# Altium PCB KUOZHAN.PCBDOC (part 13 of 21)
Units mm, origin at the board's own origin, x right, y up, seen from the top; angles counter-clockwise.
Board outline 165.51 x 116.38 mm, 2 copper layers (Top Layer, Bottom Layer); 171 components, 245 nets, 894 pads, 298 vias.
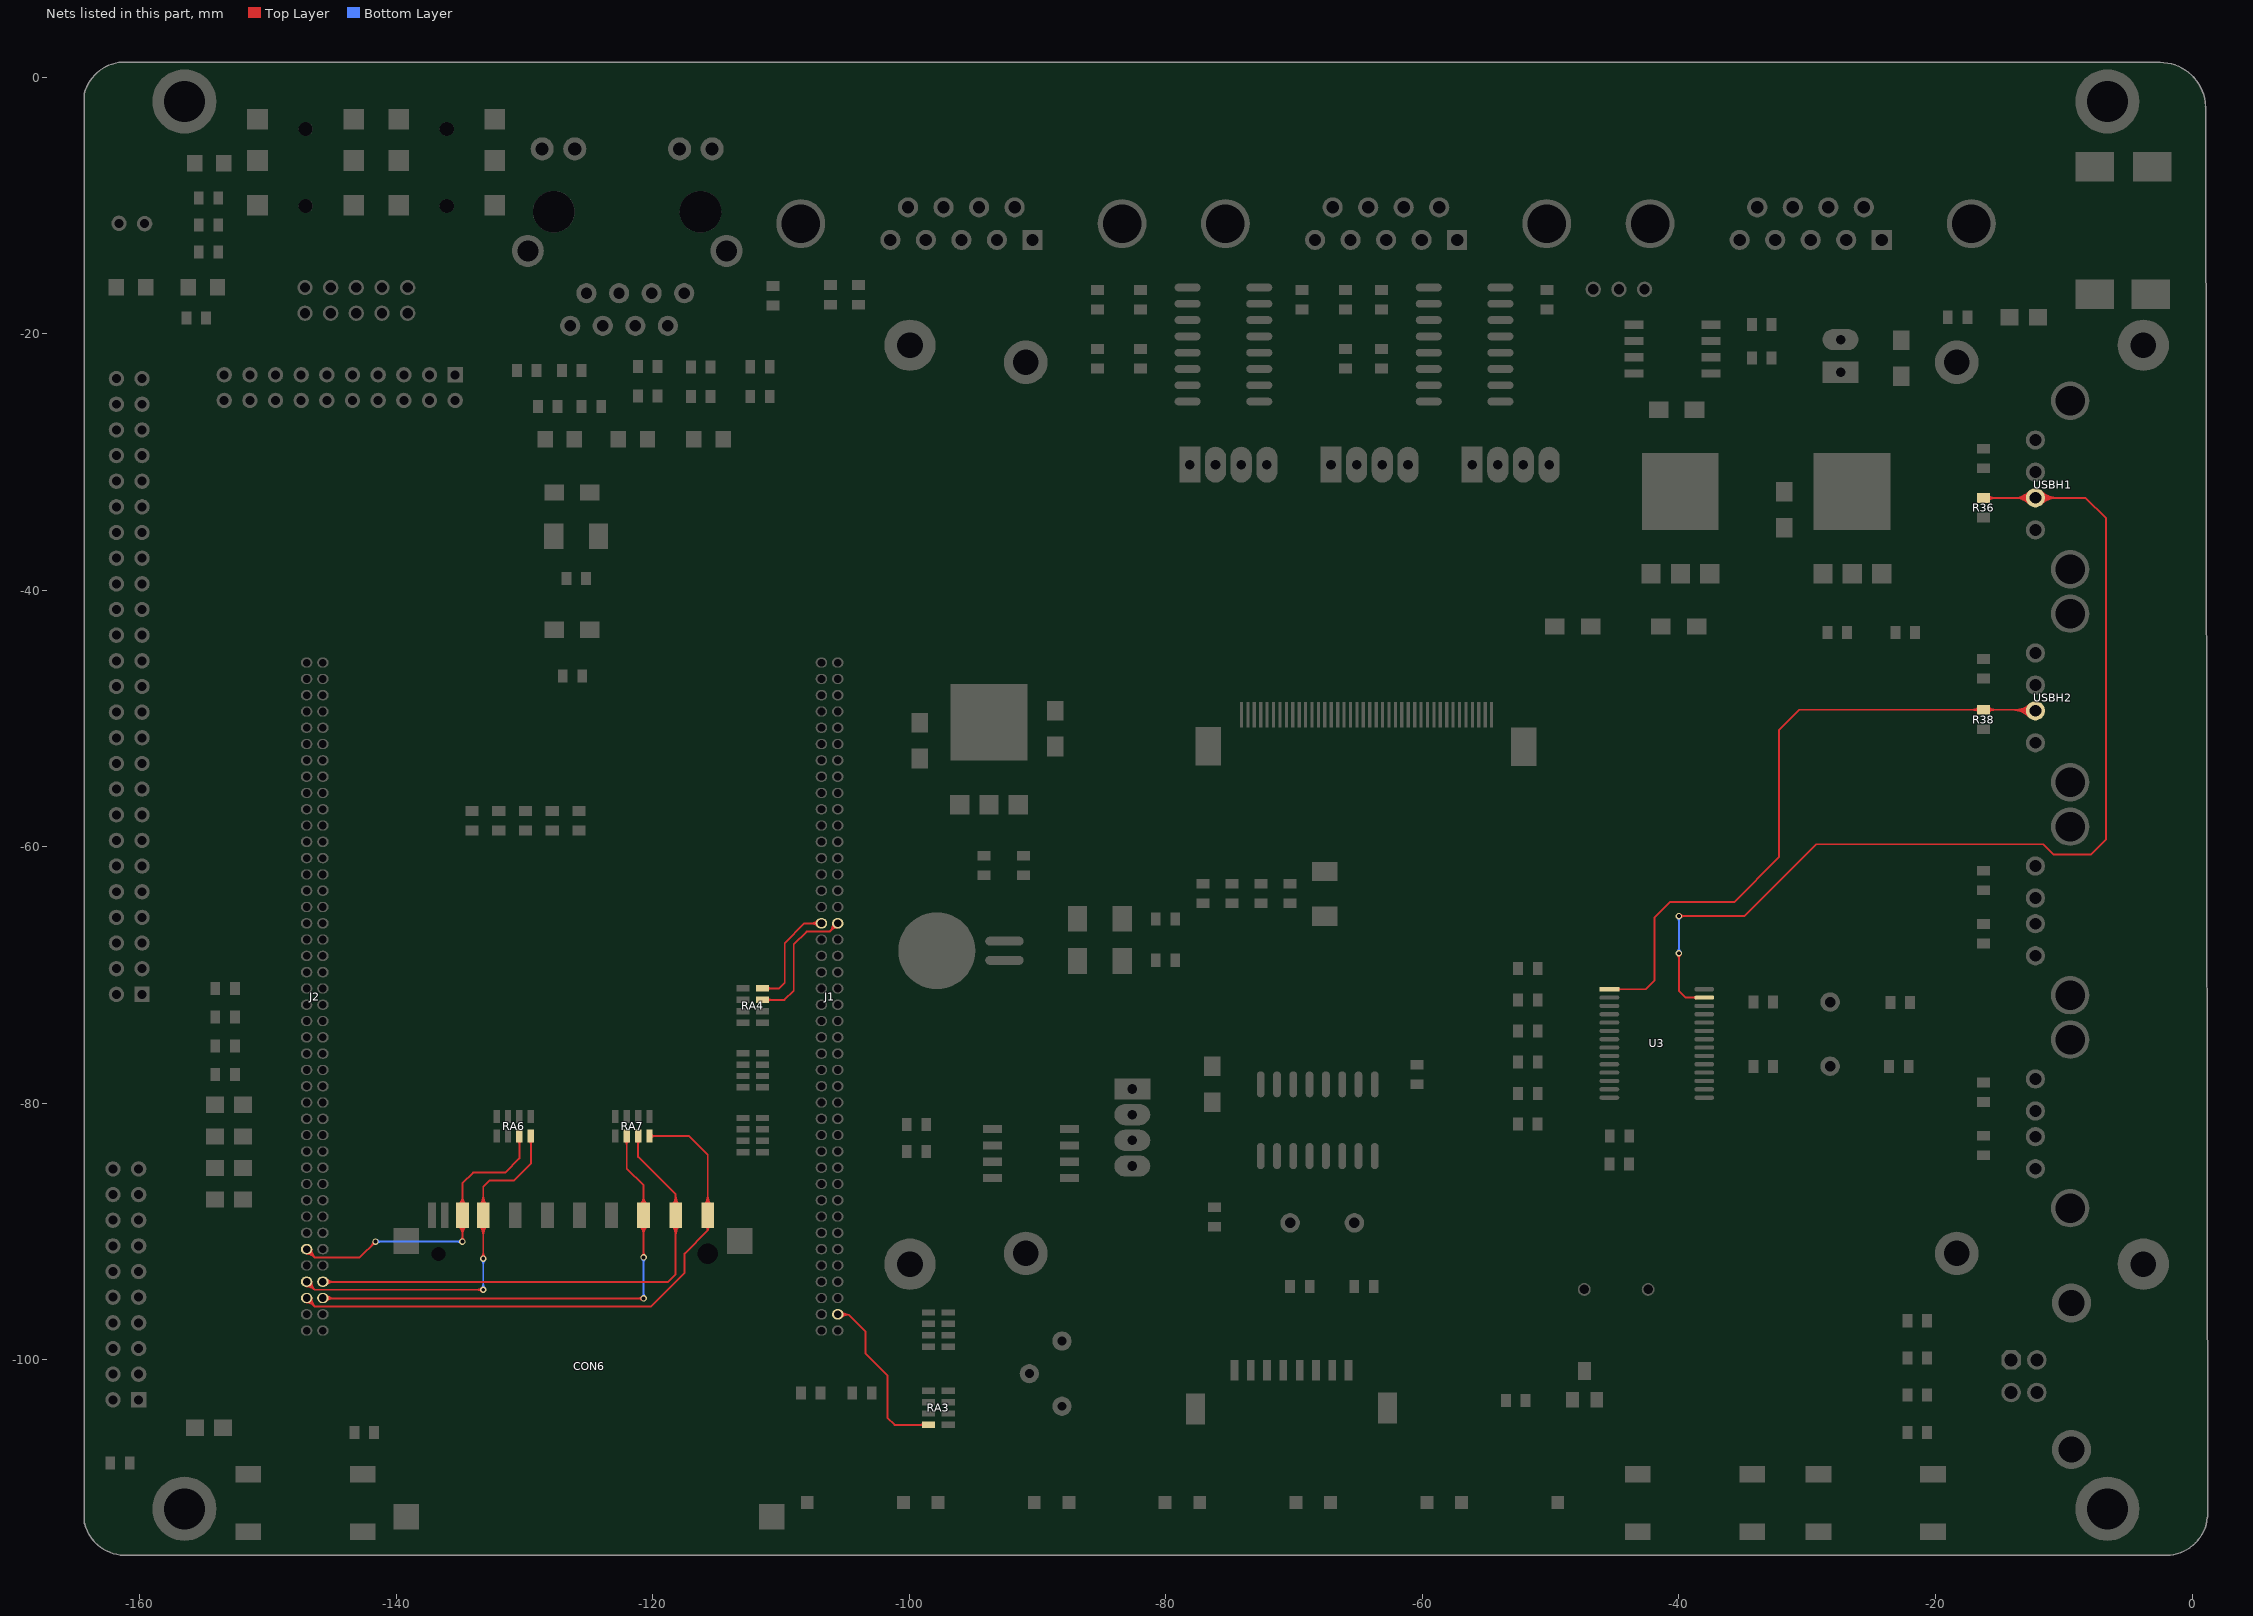
[diagram p13: the nets of this part, all layers, seen from the top]

## Via types
v1: diameter 0.5, hole 0.3, Top Layer to Bottom Layer, 272 vias
v2: diameter 0.6, hole 0.3, Top Layer to Bottom Layer, 24 vias
v3: diameter 0.9, hole 0.9, Top Layer to Bottom Layer, 2 vias

## Nets (pads, with @x,y where several pads share a name; then routed paths per layer and width w, separated by ;. In a path a pad name is that pad's centre, name@x,y a point inside that pad or via, vN(x,y) a via of type N, cw(c..) or ccw(c..) an arc to the next point about the centre after c; other vN are vias at no path point) (continued)
SDCMD: CON6.2 J2.80 RA7.6 | length 89.6
  Top Layer w0.15: J2.80@-145.703,-95.203 v1(-120.7,-95.203) ; RA7.6@-122.02,-82.544 -122.02,-85.08 -120.703,-86.397 CON6.2@-120.703,-88.729 v1(-120.703,-92.003) ; v1@-120.791,-91.915 ccw(c-121.005,-91.701) -120.703,-91.701 ccw(c-120.401,-91.701) v1@-120.615,-91.915 ; v1@-120.788,-95.291 ccw(c-121.002,-95.504) -121.002,-95.203 ccw(c-121.002,-94.901) v1@-120.788,-95.114 ; J2.80@-145.579,-95.326 cw(c-145.28,-95.625) J2.80@-145.28,-95.203 ; J2.80@-145.579,-95.326 cw(c-145.28,-95.625) J2.80@-145.28,-95.203 ; J2.80@-145.579,-95.326 cw(c-145.28,-95.625) J2.80@-145.28,-95.203 ; J2.80@-145.579,-95.079 ccw(c-145.28,-94.78) J2.80@-145.28,-95.203 ; J2.80@-145.579,-95.079 ccw(c-145.28,-94.78) J2.80@-145.28,-95.203 ; J2.80@-145.579,-95.079 ccw(c-145.28,-94.78) J2.80@-145.28,-95.203 ; J2.80@-145.473,-95.432 cw(c-144.918,-95.987) -144.918,-95.203 ; J2.80@-145.473,-95.432 cw(c-144.918,-95.987) -144.918,-95.203 ; J2.80@-145.473,-95.432 cw(c-144.918,-95.987) -144.918,-95.203 ; J2.80@-145.473,-94.973 ccw(c-144.918,-94.418) -144.918,-95.203 ; J2.80@-145.473,-94.973 ccw(c-144.918,-94.418) -144.918,-95.203 ; J2.80@-145.473,-94.973 ccw(c-144.918,-94.418) -144.918,-95.203 ; RA7.6@-122.144,-82.925 cw(c-122.442,-83.224) -122.02,-83.224 ; RA7.6@-122.144,-82.925 cw(c-122.442,-83.224) -122.02,-83.224 ; RA7.6@-122.144,-82.925 cw(c-122.442,-83.224) -122.02,-83.224 ; RA7.6@-122.144,-82.925 cw(c-122.442,-83.224) -122.02,-83.224 ; RA7.6@-122.144,-82.925 cw(c-122.442,-83.224) -122.02,-83.224 ; -122.02,-83.224 cw(c-121.597,-83.224) RA7.6@-121.896,-82.925 ; -122.02,-83.224 cw(c-121.597,-83.224) RA7.6@-121.896,-82.925 ; -122.02,-83.224 cw(c-121.597,-83.224) RA7.6@-121.896,-82.925 ; -122.02,-83.224 cw(c-121.597,-83.224) RA7.6@-121.896,-82.925 ; -122.02,-83.224 cw(c-121.597,-83.224) RA7.6@-121.896,-82.925 ; -121.122,-95.203 cw(c-121.122,-95.625) v1@-120.824,-95.326 ; -121.122,-95.203 ccw(c-121.122,-94.78) v1@-120.824,-95.079 ; -121.122,-95.203 cw(c-121.122,-95.625) v1@-120.824,-95.326 ; -121.122,-95.203 ccw(c-121.122,-94.78) v1@-120.824,-95.079 ; -121.122,-95.203 cw(c-121.122,-95.625) v1@-120.824,-95.326 ; -121.122,-95.203 ccw(c-121.122,-94.78) v1@-120.824,-95.079 ; -121.122,-95.203 ccw(c-121.122,-94.78) v1@-120.824,-95.079 ; -121.122,-95.203 cw(c-121.122,-95.625) v1@-120.824,-95.326 ; CON6.2@-121.004,-89.529 cw(c-121.729,-90.255) -120.703,-90.255 ; CON6.2@-121.004,-89.529 cw(c-121.729,-90.255) -120.703,-90.255 ; CON6.2@-121.004,-89.529 cw(c-121.729,-90.255) -120.703,-90.255 ; CON6.2@-121.004,-89.529 cw(c-121.729,-90.255) -120.703,-90.255 ; CON6.2@-121.004,-89.529 cw(c-121.729,-90.255) -120.703,-90.255 ; CON6.2@-121.004,-87.928 ccw(c-121.729,-87.203) -120.703,-87.203 ; CON6.2@-121.004,-87.928 ccw(c-121.729,-87.203) -120.703,-87.203 ; CON6.2@-121.004,-87.928 ccw(c-121.729,-87.203) -120.703,-87.203 ; CON6.2@-121.004,-87.928 ccw(c-121.729,-87.203) -120.703,-87.203 ; CON6.2@-121.004,-87.928 ccw(c-121.729,-87.203) -120.703,-87.203 ; CON6.2@-120.897,-89.423 cw(c-121.367,-89.893) -120.703,-89.893 ; CON6.2@-120.897,-89.423 cw(c-121.367,-89.893) -120.703,-89.893 ; CON6.2@-120.897,-89.423 cw(c-121.367,-89.893) -120.703,-89.893 ; CON6.2@-120.897,-89.423 cw(c-121.367,-89.893) -120.703,-89.893 ; CON6.2@-120.897,-89.423 cw(c-121.367,-89.893) -120.703,-89.893 ; CON6.2@-120.897,-88.034 ccw(c-121.367,-87.565) -120.703,-87.565 ; CON6.2@-120.897,-88.034 ccw(c-121.367,-87.565) -120.703,-87.565 ; CON6.2@-120.897,-88.034 ccw(c-121.367,-87.565) -120.703,-87.565 ; CON6.2@-120.897,-88.034 ccw(c-121.367,-87.565) -120.703,-87.565 ; CON6.2@-120.897,-88.034 ccw(c-121.367,-87.565) -120.703,-87.565 ; v1@-120.827,-91.879 ccw(c-121.125,-91.581) -120.703,-91.581 ; v1@-120.827,-91.879 ccw(c-121.125,-91.581) -120.703,-91.581 ; v1@-120.827,-91.879 ccw(c-121.125,-91.581) -120.703,-91.581 ; v1@-120.827,-91.879 ccw(c-121.125,-91.581) -120.703,-91.581 ; -120.703,-91.581 ccw(c-120.281,-91.581) v1@-120.579,-91.879 ; -120.703,-91.581 ccw(c-120.281,-91.581) v1@-120.579,-91.879 ; -120.703,-91.581 ccw(c-120.281,-91.581) v1@-120.579,-91.879 ; -120.703,-91.581 ccw(c-120.281,-91.581) v1@-120.579,-91.879 ; -120.703,-90.255 cw(c-119.677,-90.255) CON6.2@-120.402,-89.529 ; -120.703,-90.255 cw(c-119.677,-90.255) CON6.2@-120.402,-89.529 ; -120.703,-90.255 cw(c-119.677,-90.255) CON6.2@-120.402,-89.529 ; -120.703,-90.255 cw(c-119.677,-90.255) CON6.2@-120.402,-89.529 ; -120.703,-90.255 cw(c-119.677,-90.255) CON6.2@-120.402,-89.529 ; -120.703,-89.893 cw(c-120.039,-89.893) CON6.2@-120.509,-89.423 ; -120.703,-89.893 cw(c-120.039,-89.893) CON6.2@-120.509,-89.423 ; -120.703,-89.893 cw(c-120.039,-89.893) CON6.2@-120.509,-89.423 ; -120.703,-89.893 cw(c-120.039,-89.893) CON6.2@-120.509,-89.423 ; -120.703,-89.893 cw(c-120.039,-89.893) CON6.2@-120.509,-89.423 ; -120.703,-87.565 ccw(c-120.039,-87.565) CON6.2@-120.509,-88.034 ; -120.703,-87.565 ccw(c-120.039,-87.565) CON6.2@-120.509,-88.034 ; -120.703,-87.565 ccw(c-120.039,-87.565) CON6.2@-120.509,-88.034 ; -120.703,-87.565 ccw(c-120.039,-87.565) CON6.2@-120.509,-88.034 ; -120.703,-87.565 ccw(c-120.039,-87.565) CON6.2@-120.509,-88.034 ; -120.703,-87.203 ccw(c-119.677,-87.203) CON6.2@-120.402,-87.928 ; -120.703,-87.203 ccw(c-119.677,-87.203) CON6.2@-120.402,-87.928 ; -120.703,-87.203 ccw(c-119.677,-87.203) CON6.2@-120.402,-87.928 ; -120.703,-87.203 ccw(c-119.677,-87.203) CON6.2@-120.402,-87.928 ; -120.703,-87.203 ccw(c-119.677,-87.203) CON6.2@-120.402,-87.928 ; J2.80@-145.529,-95.046 ccw(c-145.15,-94.666) -145.15,-95.203 cw(c-145.15,-94.666) J2.80@-145.529,-95.046 ; J2.80@-145.423,-95.399 cw(c-144.949,-95.873) -144.949,-95.203 ccw(c-144.949,-95.873) J2.80@-145.423,-95.399 ; J2.80@-145.423,-94.939 ccw(c-144.788,-94.304) -144.788,-95.203 cw(c-144.788,-94.304) J2.80@-145.423,-94.939
  Bottom Layer w0.15: v1@-120.791,-92.091 cw(c-121.005,-92.305) -120.703,-92.305 cw(c-120.401,-92.305) v1@-120.615,-92.091 ; v1@-120.788,-95.114 ccw(c-120.995,-94.908) -120.703,-94.908 ; v1@-120.703,-95.2 v1(-120.703,-92.003) ; -120.703,-94.894 ccw(c-120.391,-94.894) v1@-120.612,-95.114 ; v1@-120.827,-92.127 cw(c-121.125,-92.425) -120.703,-92.425 ; v1@-120.827,-92.127 cw(c-121.125,-92.425) -120.703,-92.425 ; v1@-120.827,-92.127 cw(c-121.125,-92.425) -120.703,-92.425 ; v1@-120.827,-92.127 cw(c-121.125,-92.425) -120.703,-92.425 ; v1@-120.824,-95.079 ccw(c-121.115,-94.787) -120.703,-94.787 ; v1@-120.824,-95.079 ccw(c-121.115,-94.787) -120.703,-94.787 ; v1@-120.824,-95.079 ccw(c-121.115,-94.787) -120.703,-94.787 ; v1@-120.824,-95.079 ccw(c-121.115,-94.787) -120.703,-94.787 ; -120.703,-94.773 ccw(c-120.27,-94.773) v1@-120.576,-95.079 ; -120.703,-94.773 ccw(c-120.27,-94.773) v1@-120.576,-95.079 ; -120.703,-94.773 ccw(c-120.27,-94.773) v1@-120.576,-95.079 ; -120.703,-94.773 ccw(c-120.27,-94.773) v1@-120.576,-95.079 ; -120.703,-92.425 cw(c-120.281,-92.425) v1@-120.579,-92.127 ; -120.703,-92.425 cw(c-120.281,-92.425) v1@-120.579,-92.127 ; -120.703,-92.425 cw(c-120.281,-92.425) v1@-120.579,-92.127 ; -120.703,-92.425 cw(c-120.281,-92.425) v1@-120.579,-92.127
SDDATA0: CON6.7 J2.77 RA6.8 | length 76.2
  Top Layer w0.15: J2.77@-146.973,-93.899 -146.348,-94.524 v1(-133.203,-94.524) ; v1@-133.291,-92.009 ccw(c-133.505,-91.795) -133.203,-91.795 ccw(c-132.901,-91.795) v1@-133.115,-92.009 ; v1(-133.203,-92.097) CON6.7@-133.203,-88.729 -133.203,-86.503 -132.7,-86 -130.8,-86 -129.496,-84.696 RA6.8@-129.496,-82.544 ; J2.77@-146.973,-94.257 cw(c-146.973,-95.041) -146.418,-94.487 ; J2.77@-146.973,-94.257 cw(c-146.973,-95.041) -146.418,-94.487 ; J2.77@-146.973,-94.257 cw(c-146.973,-95.041) -146.418,-94.487 ; J2.77@-146.973,-94.107 cw(c-146.973,-94.529) -146.674,-94.231 ; J2.77@-146.973,-94.107 cw(c-146.973,-94.529) -146.674,-94.231 ; J2.77@-146.973,-94.107 cw(c-146.973,-94.529) -146.674,-94.231 ; J2.77@-146.798,-93.932 ccw(c-146.375,-93.932) -146.674,-94.231 ; J2.77@-146.798,-93.932 ccw(c-146.375,-93.932) -146.674,-94.231 ; J2.77@-146.798,-93.932 ccw(c-146.375,-93.932) -146.674,-94.231 ; J2.77@-146.648,-93.932 ccw(c-145.863,-93.932) -146.418,-94.487 ; J2.77@-146.648,-93.932 ccw(c-145.863,-93.932) -146.418,-94.487 ; J2.77@-146.648,-93.932 ccw(c-145.863,-93.932) -146.418,-94.487 ; -133.625,-94.524 cw(c-133.625,-94.947) -133.327,-94.648 ccw(c-133.625,-94.947) -133.625,-94.524 ; -133.625,-94.524 ccw(c-133.625,-94.102) -133.327,-94.401 cw(c-133.625,-94.102) -133.625,-94.524 ; CON6.7@-133.504,-89.529 cw(c-134.229,-90.255) -133.203,-90.255 ; CON6.7@-133.504,-89.529 cw(c-134.229,-90.255) -133.203,-90.255 ; CON6.7@-133.504,-89.529 cw(c-134.229,-90.255) -133.203,-90.255 ; CON6.7@-133.504,-89.529 cw(c-134.229,-90.255) -133.203,-90.255 ; CON6.7@-133.504,-89.529 cw(c-134.229,-90.255) -133.203,-90.255 ; CON6.7@-133.504,-87.928 ccw(c-134.229,-87.203) -133.203,-87.203 ; CON6.7@-133.504,-87.928 ccw(c-134.229,-87.203) -133.203,-87.203 ; CON6.7@-133.504,-87.928 ccw(c-134.229,-87.203) -133.203,-87.203 ; CON6.7@-133.504,-87.928 ccw(c-134.229,-87.203) -133.203,-87.203 ; CON6.7@-133.504,-87.928 ccw(c-134.229,-87.203) -133.203,-87.203 ; CON6.7@-133.397,-89.423 cw(c-133.867,-89.893) -133.203,-89.893 ; CON6.7@-133.397,-89.423 cw(c-133.867,-89.893) -133.203,-89.893 ; CON6.7@-133.397,-89.423 cw(c-133.867,-89.893) -133.203,-89.893 ; CON6.7@-133.397,-89.423 cw(c-133.867,-89.893) -133.203,-89.893 ; CON6.7@-133.397,-89.423 cw(c-133.867,-89.893) -133.203,-89.893 ; CON6.7@-133.397,-88.034 ccw(c-133.867,-87.565) -133.203,-87.565 ; CON6.7@-133.397,-88.034 ccw(c-133.867,-87.565) -133.203,-87.565 ; CON6.7@-133.397,-88.034 ccw(c-133.867,-87.565) -133.203,-87.565 ; CON6.7@-133.397,-88.034 ccw(c-133.867,-87.565) -133.203,-87.565 ; CON6.7@-133.397,-88.034 ccw(c-133.867,-87.565) -133.203,-87.565 ; v1@-133.327,-91.973 ccw(c-133.625,-91.675) -133.203,-91.675 ; v1@-133.327,-91.973 ccw(c-133.625,-91.675) -133.203,-91.675 ; v1@-133.327,-91.973 ccw(c-133.625,-91.675) -133.203,-91.675 ; v1@-133.327,-91.973 ccw(c-133.625,-91.675) -133.203,-91.675 ; -133.203,-91.675 ccw(c-132.781,-91.675) v1@-133.079,-91.973 ; -133.203,-91.675 ccw(c-132.781,-91.675) v1@-133.079,-91.973 ; -133.203,-91.675 ccw(c-132.781,-91.675) v1@-133.079,-91.973 ; -133.203,-91.675 ccw(c-132.781,-91.675) v1@-133.079,-91.973 ; -133.203,-90.255 cw(c-132.177,-90.255) CON6.7@-132.902,-89.529 ; -133.203,-90.255 cw(c-132.177,-90.255) CON6.7@-132.902,-89.529 ; -133.203,-90.255 cw(c-132.177,-90.255) CON6.7@-132.902,-89.529 ; -133.203,-90.255 cw(c-132.177,-90.255) CON6.7@-132.902,-89.529 ; -133.203,-90.255 cw(c-132.177,-90.255) CON6.7@-132.902,-89.529 ; -133.203,-89.893 cw(c-132.539,-89.893) CON6.7@-133.009,-89.423 ; -133.203,-89.893 cw(c-132.539,-89.893) CON6.7@-133.009,-89.423 ; -133.203,-89.893 cw(c-132.539,-89.893) CON6.7@-133.009,-89.423 ; -133.203,-89.893 cw(c-132.539,-89.893) CON6.7@-133.009,-89.423 ; -133.203,-89.893 cw(c-132.539,-89.893) CON6.7@-133.009,-89.423 ; -133.203,-87.565 ccw(c-132.539,-87.565) CON6.7@-133.009,-88.034 ; -133.203,-87.565 ccw(c-132.539,-87.565) CON6.7@-133.009,-88.034 ; -133.203,-87.565 ccw(c-132.539,-87.565) CON6.7@-133.009,-88.034 ; -133.203,-87.565 ccw(c-132.539,-87.565) CON6.7@-133.009,-88.034 ; -133.203,-87.565 ccw(c-132.539,-87.565) CON6.7@-133.009,-88.034 ; -133.203,-87.203 ccw(c-132.177,-87.203) CON6.7@-132.902,-87.928 ; -133.203,-87.203 ccw(c-132.177,-87.203) CON6.7@-132.902,-87.928 ; -133.203,-87.203 ccw(c-132.177,-87.203) CON6.7@-132.902,-87.928 ; -133.203,-87.203 ccw(c-132.177,-87.203) CON6.7@-132.902,-87.928 ; -133.203,-87.203 ccw(c-132.177,-87.203) CON6.7@-132.902,-87.928 ; RA6.8@-129.62,-82.925 cw(c-129.919,-83.224) -129.496,-83.224 ; RA6.8@-129.62,-82.925 cw(c-129.919,-83.224) -129.496,-83.224 ; RA6.8@-129.62,-82.925 cw(c-129.919,-83.224) -129.496,-83.224 ; RA6.8@-129.62,-82.925 cw(c-129.919,-83.224) -129.496,-83.224 ; RA6.8@-129.62,-82.925 cw(c-129.919,-83.224) -129.496,-83.224 ; -129.496,-83.224 cw(c-129.074,-83.224) RA6.8@-129.372,-82.925 ; -129.496,-83.224 cw(c-129.074,-83.224) RA6.8@-129.372,-82.925 ; -129.496,-83.224 cw(c-129.074,-83.224) RA6.8@-129.372,-82.925 ; -129.496,-83.224 cw(c-129.074,-83.224) RA6.8@-129.372,-82.925 ; -129.496,-83.224 cw(c-129.074,-83.224) RA6.8@-129.372,-82.925 ; J2.77@-146.923,-94.224 cw(c-146.923,-94.888) -146.453,-94.419 ccw(c-146.923,-94.888) J2.77@-146.923,-94.224 ; J2.77@-146.748,-93.908 ccw(c-146.283,-93.931) -146.612,-94.26 cw(c-146.283,-93.931) J2.77@-146.748,-93.908 ; J2.77@-146.598,-93.915 ccw(c-145.827,-93.953) -146.373,-94.499 cw(c-145.827,-93.953) J2.77@-146.598,-93.915
  Bottom Layer w0.15: v1@-133.291,-92.185 cw(c-133.505,-92.399) -133.203,-92.399 cw(c-132.901,-92.399) v1@-133.115,-92.185 ; v1(-133.203,-94.524) v1(-133.203,-92.097) ; v1@-133.327,-92.221 cw(c-133.625,-92.519) -133.203,-92.519 ; v1@-133.327,-92.221 cw(c-133.625,-92.519) -133.203,-92.519 ; v1@-133.327,-92.221 cw(c-133.625,-92.519) -133.203,-92.519 ; v1@-133.327,-92.221 cw(c-133.625,-92.519) -133.203,-92.519 ; -133.203,-94.102 cw(c-133.625,-94.102) -133.327,-94.401 ccw(c-133.625,-94.102) -133.203,-94.102 ; -133.203,-94.102 ccw(c-132.781,-94.102) -133.079,-94.401 cw(c-132.781,-94.102) -133.203,-94.102 ; -133.203,-92.519 cw(c-132.781,-92.519) v1@-133.079,-92.221 ; -133.203,-92.519 cw(c-132.781,-92.519) v1@-133.079,-92.221 ; -133.203,-92.519 cw(c-132.781,-92.519) v1@-133.079,-92.221 ; -133.203,-92.519 cw(c-132.781,-92.519) v1@-133.079,-92.221
SDDATA1: CON6.8 J2.73 RA6.7 | length 79.6
  Top Layer w0.15: J2.73@-146.973,-91.39 -146.348,-92.015 ; J2.73@-146.973,-91.359 -146.332,-92 -142.828,-92 v1(-141.6,-90.772) ; v1@-141.725,-90.772 cw(c-142.027,-90.772) -141.813,-90.985 cw(c-141.6,-91.199) v1@-141.6,-90.897 ; v1@-134.916,-90.684 ccw(c-135.13,-90.47) -134.828,-90.47 ccw(c-134.526,-90.47) v1@-134.74,-90.684 ; v1(-134.828,-90.772) CON6.8@-134.828,-88.729 -134.828,-86.228 -134,-85.4 -131.5,-85.4 -130.385,-84.285 RA6.7@-130.385,-82.544 ; J2.73@-146.973,-91.715 cw(c-146.973,-92.5) -146.418,-91.945 ; J2.73@-146.973,-91.715 cw(c-146.973,-92.5) -146.418,-91.945 ; J2.73@-146.973,-91.715 cw(c-146.973,-92.5) -146.418,-91.945 ; J2.73@-146.973,-91.565 cw(c-146.973,-91.988) -146.674,-91.689 ; J2.73@-146.973,-91.565 cw(c-146.973,-91.988) -146.674,-91.689 ; J2.73@-146.973,-91.565 cw(c-146.973,-91.988) -146.674,-91.689 ; J2.73@-146.923,-91.684 cw(c-146.923,-92.348) -146.453,-91.879 ccw(c-146.923,-92.348) J2.73@-146.923,-91.684 ; J2.73@-146.923,-91.684 cw(c-146.923,-92.274) -146.506,-91.857 ccw(c-146.923,-92.274) J2.73@-146.923,-91.684 ; J2.73@-146.798,-91.39 ccw(c-146.375,-91.39) -146.674,-91.689 ; J2.73@-146.798,-91.39 ccw(c-146.375,-91.39) -146.674,-91.689 ; J2.73@-146.798,-91.39 ccw(c-146.375,-91.39) -146.674,-91.689 ; J2.73@-146.648,-91.39 ccw(c-145.863,-91.39) -146.418,-91.945 ; J2.73@-146.648,-91.39 ccw(c-145.863,-91.39) -146.418,-91.945 ; J2.73@-146.648,-91.39 ccw(c-145.863,-91.39) -146.418,-91.945 ; -141.899,-91.071 cw(c-141.6,-91.369) v1@-141.6,-90.947 ; -141.899,-91.071 ccw(c-142.197,-90.772) v1@-141.775,-90.772 ; -141.899,-91.071 cw(c-141.6,-91.369) v1@-141.6,-90.947 ; -141.899,-91.071 ccw(c-142.197,-90.772) v1@-141.775,-90.772 ; -141.899,-91.071 cw(c-141.6,-91.369) v1@-141.6,-90.947 ; -141.899,-91.071 ccw(c-142.197,-90.772) v1@-141.775,-90.772 ; -141.899,-91.071 ccw(c-142.197,-90.772) v1@-141.775,-90.772 ; -141.899,-91.071 cw(c-141.6,-91.369) v1@-141.6,-90.947 ; CON6.8@-135.129,-89.529 cw(c-135.854,-90.255) -134.828,-90.255 ; CON6.8@-135.129,-89.529 cw(c-135.854,-90.255) -134.828,-90.255 ; CON6.8@-135.129,-89.529 cw(c-135.854,-90.255) -134.828,-90.255 ; CON6.8@-135.129,-89.529 cw(c-135.854,-90.255) -134.828,-90.255 ; CON6.8@-135.129,-89.529 cw(c-135.854,-90.255) -134.828,-90.255 ; CON6.8@-135.129,-87.928 ccw(c-135.854,-87.203) -134.828,-87.203 ; CON6.8@-135.129,-87.928 ccw(c-135.854,-87.203) -134.828,-87.203 ; CON6.8@-135.129,-87.928 ccw(c-135.854,-87.203) -134.828,-87.203 ; CON6.8@-135.129,-87.928 ccw(c-135.854,-87.203) -134.828,-87.203 ; CON6.8@-135.129,-87.928 ccw(c-135.854,-87.203) -134.828,-87.203 ; CON6.8@-135.022,-89.423 cw(c-135.492,-89.893) -134.828,-89.893 ; CON6.8@-135.022,-89.423 cw(c-135.492,-89.893) -134.828,-89.893 ; CON6.8@-135.022,-89.423 cw(c-135.492,-89.893) -134.828,-89.893 ; CON6.8@-135.022,-89.423 cw(c-135.492,-89.893) -134.828,-89.893 ; CON6.8@-135.022,-89.423 cw(c-135.492,-89.893) -134.828,-89.893 ; CON6.8@-135.022,-88.034 ccw(c-135.492,-87.565) -134.828,-87.565 ; CON6.8@-135.022,-88.034 ccw(c-135.492,-87.565) -134.828,-87.565 ; CON6.8@-135.022,-88.034 ccw(c-135.492,-87.565) -134.828,-87.565 ; CON6.8@-135.022,-88.034 ccw(c-135.492,-87.565) -134.828,-87.565 ; CON6.8@-135.022,-88.034 ccw(c-135.492,-87.565) -134.828,-87.565 ; v1@-134.952,-90.648 ccw(c-135.25,-90.35) -134.828,-90.35 ; v1@-134.952,-90.648 ccw(c-135.25,-90.35) -134.828,-90.35 ; v1@-134.952,-90.648 ccw(c-135.25,-90.35) -134.828,-90.35 ; v1@-134.952,-90.648 ccw(c-135.25,-90.35) -134.828,-90.35 ; -134.828,-90.35 ccw(c-134.406,-90.35) v1@-134.704,-90.648 ; -134.828,-90.35 ccw(c-134.406,-90.35) v1@-134.704,-90.648 ; -134.828,-90.35 ccw(c-134.406,-90.35) v1@-134.704,-90.648 ; -134.828,-90.35 ccw(c-134.406,-90.35) v1@-134.704,-90.648 ; -134.828,-90.255 cw(c-133.802,-90.255) CON6.8@-134.527,-89.529 ; -134.828,-90.255 cw(c-133.802,-90.255) CON6.8@-134.527,-89.529 ; -134.828,-90.255 cw(c-133.802,-90.255) CON6.8@-134.527,-89.529 ; -134.828,-90.255 cw(c-133.802,-90.255) CON6.8@-134.527,-89.529 ; -134.828,-90.255 cw(c-133.802,-90.255) CON6.8@-134.527,-89.529 ; -134.828,-89.893 cw(c-134.164,-89.893) CON6.8@-134.634,-89.423 ; -134.828,-89.893 cw(c-134.164,-89.893) CON6.8@-134.634,-89.423 ; -134.828,-89.893 cw(c-134.164,-89.893) CON6.8@-134.634,-89.423 ; -134.828,-89.893 cw(c-134.164,-89.893) CON6.8@-134.634,-89.423 ; -134.828,-89.893 cw(c-134.164,-89.893) CON6.8@-134.634,-89.423 ; -134.828,-87.565 ccw(c-134.164,-87.565) CON6.8@-134.634,-88.034 ; -134.828,-87.565 ccw(c-134.164,-87.565) CON6.8@-134.634,-88.034 ; -134.828,-87.565 ccw(c-134.164,-87.565) CON6.8@-134.634,-88.034 ; -134.828,-87.565 ccw(c-134.164,-87.565) CON6.8@-134.634,-88.034 ; -134.828,-87.565 ccw(c-134.164,-87.565) CON6.8@-134.634,-88.034 ; -134.828,-87.203 ccw(c-133.802,-87.203) CON6.8@-134.527,-87.928 ; -134.828,-87.203 ccw(c-133.802,-87.203) CON6.8@-134.527,-87.928 ; -134.828,-87.203 ccw(c-133.802,-87.203) CON6.8@-134.527,-87.928 ; -134.828,-87.203 ccw(c-133.802,-87.203) CON6.8@-134.527,-87.928 ; -134.828,-87.203 ccw(c-133.802,-87.203) CON6.8@-134.527,-87.928 ; RA6.7@-130.509,-82.925 cw(c-130.808,-83.224) -130.385,-83.224 ; RA6.7@-130.509,-82.925 cw(c-130.808,-83.224) -130.385,-83.224 ; RA6.7@-130.509,-82.925 cw(c-130.808,-83.224) -130.385,-83.224 ; RA6.7@-130.509,-82.925 cw(c-130.808,-83.224) -130.385,-83.224 ; RA6.7@-130.509,-82.925 cw(c-130.808,-83.224) -130.385,-83.224 ; -130.385,-83.224 cw(c-129.963,-83.224) RA6.7@-130.261,-82.925 ; -130.385,-83.224 cw(c-129.963,-83.224) RA6.7@-130.261,-82.925 ; -130.385,-83.224 cw(c-129.963,-83.224) RA6.7@-130.261,-82.925 ; -130.385,-83.224 cw(c-129.963,-83.224) RA6.7@-130.261,-82.925 ; -130.385,-83.224 cw(c-129.963,-83.224) RA6.7@-130.261,-82.925 ; J2.73@-146.749,-91.376 ccw(c-146.284,-91.419) -146.614,-91.749 cw(c-146.284,-91.419) J2.73@-146.749,-91.376 ; J2.73@-146.748,-91.364 ccw(c-146.253,-91.379) -146.603,-91.729 cw(c-146.253,-91.379) J2.73@-146.748,-91.364 ; J2.73@-146.599,-91.39 ccw(c-145.871,-91.458) -146.388,-91.975 cw(c-145.871,-91.458) J2.73@-146.599,-91.39 ; J2.73@-146.598,-91.369 ccw(c-145.775,-91.393) -146.357,-91.975 cw(c-145.775,-91.393) J2.73@-146.598,-91.369
  Bottom Layer w0.15: v1(-141.6,-90.772) v1(-134.828,-90.772) ; v1@-141.512,-90.86 cw(c-141.298,-91.074) -141.298,-90.772 cw(c-141.298,-90.47) v1@-141.512,-90.684 ; v1@-134.916,-90.86 ccw(c-135.13,-91.074) -135.13,-90.772 ccw(c-135.13,-90.47) v1@-134.916,-90.684 ; v1@-141.476,-90.896 cw(c-141.178,-91.194) -141.178,-90.772 ; v1@-141.476,-90.896 cw(c-141.178,-91.194) -141.178,-90.772 ; v1@-141.476,-90.896 cw(c-141.178,-91.194) -141.178,-90.772 ; v1@-141.476,-90.896 cw(c-141.178,-91.194) -141.178,-90.772 ; v1@-141.476,-90.648 ccw(c-141.178,-90.35) -141.178,-90.772 ; v1@-141.476,-90.648 ccw(c-141.178,-90.35) -141.178,-90.772 ; v1@-141.476,-90.648 ccw(c-141.178,-90.35) -141.178,-90.772 ; v1@-141.476,-90.648 ccw(c-141.178,-90.35) -141.178,-90.772 ; -135.25,-90.772 cw(c-135.25,-91.194) v1@-134.952,-90.896 ; -135.25,-90.772 ccw(c-135.25,-90.35) v1@-134.952,-90.648 ; -135.25,-90.772 cw(c-135.25,-91.194) v1@-134.952,-90.896 ; -135.25,-90.772 ccw(c-135.25,-90.35) v1@-134.952,-90.648 ; -135.25,-90.772 cw(c-135.25,-91.194) v1@-134.952,-90.896 ; -135.25,-90.772 ccw(c-135.25,-90.35) v1@-134.952,-90.648 ; -135.25,-90.772 ccw(c-135.25,-90.35) v1@-134.952,-90.648 ; -135.25,-90.772 cw(c-135.25,-91.194) v1@-134.952,-90.896
SDDATA2: CON6.9 J2.79 RA7.8 | length 78.9
  Top Layer w0.15: J2.79@-146.973,-95.203 -146.348,-95.828 ; J2.79@-146.973,-95.169 -146.328,-95.814 -120.114,-95.814 -120.04,-95.74 -117.5,-93.2 -117.5,-91.7 -115.703,-89.903 ; RA7.8@-120.242,-82.544 -117.156,-82.544 -115.703,-83.997 -115.703,-86.5 CON6.9@-115.703,-88.729 -115.703,-89.903 ; J2.79@-146.973,-95.528 cw(c-146.973,-96.312) -146.418,-95.757 ; J2.79@-146.973,-95.528 cw(c-146.973,-96.312) -146.418,-95.757 ; J2.79@-146.973,-95.528 cw(c-146.973,-96.312) -146.418,-95.757 ; J2.79@-146.973,-95.378 cw(c-146.973,-95.8) -146.674,-95.501 ; J2.79@-146.973,-95.378 cw(c-146.973,-95.8) -146.674,-95.501 ; J2.79@-146.973,-95.378 cw(c-146.973,-95.8) -146.674,-95.501 ; J2.79@-146.923,-95.494 cw(c-146.923,-96.158) -146.453,-95.689 ccw(c-146.923,-96.158) J2.79@-146.923,-95.494 ; J2.79@-146.923,-95.494 cw(c-146.923,-96.078) -146.51,-95.665 ccw(c-146.923,-96.078) J2.79@-146.923,-95.494 ; J2.79@-146.798,-95.203 ccw(c-146.375,-95.203) -146.674,-95.501 ; J2.79@-146.798,-95.203 ccw(c-146.375,-95.203) -146.674,-95.501 ; J2.79@-146.798,-95.203 ccw(c-146.375,-95.203) -146.674,-95.501 ; J2.79@-146.648,-95.203 ccw(c-145.863,-95.203) -146.418,-95.757 ; J2.79@-146.648,-95.203 ccw(c-145.863,-95.203) -146.418,-95.757 ; J2.79@-146.648,-95.203 ccw(c-145.863,-95.203) -146.418,-95.757 ; RA7.8@-120.118,-82.667 cw(c-119.819,-82.966) -119.819,-82.544 ; RA7.8@-120.118,-82.667 cw(c-119.819,-82.966) -119.819,-82.544 ; RA7.8@-120.118,-82.667 cw(c-119.819,-82.966) -119.819,-82.544 ; RA7.8@-120.118,-82.667 cw(c-119.819,-82.966) -119.819,-82.544 ; RA7.8@-120.118,-82.667 cw(c-119.819,-82.966) -119.819,-82.544 ; RA7.8@-120.118,-82.42 ccw(c-119.819,-82.121) -119.819,-82.544 ; RA7.8@-120.118,-82.42 ccw(c-119.819,-82.121) -119.819,-82.544 ; RA7.8@-120.118,-82.42 ccw(c-119.819,-82.121) -119.819,-82.544 ; RA7.8@-120.118,-82.42 ccw(c-119.819,-82.121) -119.819,-82.544 ; RA7.8@-120.118,-82.42 ccw(c-119.819,-82.121) -119.819,-82.544 ; CON6.9@-116.004,-87.928 ccw(c-116.729,-87.203) -115.703,-87.203 ; CON6.9@-116.004,-87.928 ccw(c-116.729,-87.203) -115.703,-87.203 ; CON6.9@-116.004,-87.928 ccw(c-116.729,-87.203) -115.703,-87.203 ; CON6.9@-116.004,-87.928 ccw(c-116.729,-87.203) -115.703,-87.203 ; CON6.9@-116.004,-87.928 ccw(c-116.729,-87.203) -115.703,-87.203 ; CON6.9@-115.897,-88.034 ccw(c-116.367,-87.565) -115.703,-87.565 ; CON6.9@-115.897,-88.034 ccw(c-116.367,-87.565) -115.703,-87.565 ; CON6.9@-115.897,-88.034 ccw(c-116.367,-87.565) -115.703,-87.565 ; CON6.9@-115.897,-88.034 ccw(c-116.367,-87.565) -115.703,-87.565 ; CON6.9@-115.897,-88.034 ccw(c-116.367,-87.565) -115.703,-87.565 ; CON6.9@-115.886,-89.612 cw(c-116.026,-89.903) -115.703,-89.903 ; CON6.9@-115.886,-89.612 cw(c-116.026,-89.903) -115.703,-89.903 ; CON6.9@-115.886,-89.612 cw(c-116.026,-89.903) -115.703,-89.903 ; CON6.9@-115.886,-89.612 cw(c-116.026,-89.903) -115.703,-89.903 ; CON6.9@-115.886,-89.612 cw(c-116.026,-89.903) -115.703,-89.903 ; -115.703,-89.903 cw(c-115.38,-89.903) CON6.9@-115.52,-89.612 ; -115.703,-89.903 cw(c-115.38,-89.903) CON6.9@-115.52,-89.612 ; -115.703,-89.903 cw(c-115.38,-89.903) CON6.9@-115.52,-89.612 ; -115.703,-89.903 cw(c-115.38,-89.903) CON6.9@-115.52,-89.612 ; -115.703,-89.903 cw(c-115.38,-89.903) CON6.9@-115.52,-89.612 ; -115.703,-87.565 ccw(c-115.039,-87.565) CON6.9@-115.509,-88.034 ; -115.703,-87.565 ccw(c-115.039,-87.565) CON6.9@-115.509,-88.034 ; -115.703,-87.565 ccw(c-115.039,-87.565) CON6.9@-115.509,-88.034 ; -115.703,-87.565 ccw(c-115.039,-87.565) CON6.9@-115.509,-88.034 ; -115.703,-87.565 ccw(c-115.039,-87.565) CON6.9@-115.509,-88.034 ; -115.703,-87.203 ccw(c-114.677,-87.203) CON6.9@-115.402,-87.928 ; -115.703,-87.203 ccw(c-114.677,-87.203) CON6.9@-115.402,-87.928 ; -115.703,-87.203 ccw(c-114.677,-87.203) CON6.9@-115.402,-87.928 ; -115.703,-87.203 ccw(c-114.677,-87.203) CON6.9@-115.402,-87.928 ; -115.703,-87.203 ccw(c-114.677,-87.203) CON6.9@-115.402,-87.928 ; J2.79@-146.749,-95.186 ccw(c-146.284,-95.231) -146.614,-95.561 cw(c-146.284,-95.231) J2.79@-146.749,-95.186 ; J2.79@-146.748,-95.173 ccw(c-146.244,-95.186) -146.6,-95.542 cw(c-146.244,-95.186) J2.79@-146.748,-95.173 ; J2.79@-146.599,-95.201 ccw(c-145.875,-95.271) -146.39,-95.786 cw(c-145.875,-95.271) J2.79@-146.599,-95.201 ; J2.79@-146.598,-95.177 ccw(c-145.761,-95.197) -146.353,-95.789 cw(c-145.761,-95.197) J2.79@-146.598,-95.177
SDDATA3: CON6.1 J2.78 RA7.7 | length 78.6
  Top Layer w0.15: J2.78@-145.703,-93.932 -118.832,-93.932 -118.203,-93.303 -118.203,-92.003 CON6.1@-118.203,-88.729 -118.203,-87.097 -121.131,-84.169 RA7.7@-121.131,-82.544 ; J2.78@-145.579,-94.056 cw(c-145.28,-94.354) J2.78@-145.28,-93.932 ; J2.78@-145.579,-94.056 cw(c-145.28,-94.354) J2.78@-145.28,-93.932 ; J2.78@-145.579,-94.056 cw(c-145.28,-94.354) J2.78@-145.28,-93.932 ; J2.78@-145.579,-93.808 ccw(c-145.28,-93.509) J2.78@-145.28,-93.932 ; J2.78@-145.579,-93.808 ccw(c-145.28,-93.509) J2.78@-145.28,-93.932 ; J2.78@-145.579,-93.808 ccw(c-145.28,-93.509) J2.78@-145.28,-93.932 ; J2.78@-145.473,-94.162 cw(c-144.918,-94.716) -144.918,-93.932 ; J2.78@-145.473,-94.162 cw(c-144.918,-94.716) -144.918,-93.932 ; J2.78@-145.473,-94.162 cw(c-144.918,-94.716) -144.918,-93.932 ; J2.78@-145.473,-93.702 ccw(c-144.918,-93.147) -144.918,-93.932 ; J2.78@-145.473,-93.702 ccw(c-144.918,-93.147) -144.918,-93.932 ; J2.78@-145.473,-93.702 ccw(c-144.918,-93.147) -144.918,-93.932 ; RA7.7@-121.255,-82.925 cw(c-121.553,-83.224) -121.131,-83.224 ; RA7.7@-121.255,-82.925 cw(c-121.553,-83.224) -121.131,-83.224 ; RA7.7@-121.255,-82.925 cw(c-121.553,-83.224) -121.131,-83.224 ; RA7.7@-121.255,-82.925 cw(c-121.553,-83.224) -121.131,-83.224 ; RA7.7@-121.255,-82.925 cw(c-121.553,-83.224) -121.131,-83.224 ; -121.131,-83.224 cw(c-120.708,-83.224) RA7.7@-121.007,-82.925 ; -121.131,-83.224 cw(c-120.708,-83.224) RA7.7@-121.007,-82.925 ; -121.131,-83.224 cw(c-120.708,-83.224) RA7.7@-121.007,-82.925 ; -121.131,-83.224 cw(c-120.708,-83.224) RA7.7@-121.007,-82.925 ; -121.131,-83.224 cw(c-120.708,-83.224) RA7.7@-121.007,-82.925 ; CON6.1@-118.504,-89.529 cw(c-119.229,-90.255) -118.203,-90.255 ; CON6.1@-118.504,-89.529 cw(c-119.229,-90.255) -118.203,-90.255 ; CON6.1@-118.504,-89.529 cw(c-119.229,-90.255) -118.203,-90.255 ; CON6.1@-118.504,-89.529 cw(c-119.229,-90.255) -118.203,-90.255 ; CON6.1@-118.504,-89.529 cw(c-119.229,-90.255) -118.203,-90.255 ; CON6.1@-118.504,-87.928 ccw(c-119.229,-87.203) -118.203,-87.203 ; CON6.1@-118.504,-87.928 ccw(c-119.229,-87.203) -118.203,-87.203 ; CON6.1@-118.504,-87.928 ccw(c-119.229,-87.203) -118.203,-87.203 ; CON6.1@-118.504,-87.928 ccw(c-119.229,-87.203) -118.203,-87.203 ; CON6.1@-118.504,-87.928 ccw(c-119.229,-87.203) -118.203,-87.203 ; CON6.1@-118.397,-89.423 cw(c-118.867,-89.893) -118.203,-89.893 ; CON6.1@-118.397,-89.423 cw(c-118.867,-89.893) -118.203,-89.893 ; CON6.1@-118.397,-89.423 cw(c-118.867,-89.893) -118.203,-89.893 ; CON6.1@-118.397,-89.423 cw(c-118.867,-89.893) -118.203,-89.893 ; CON6.1@-118.397,-89.423 cw(c-118.867,-89.893) -118.203,-89.893 ; CON6.1@-118.397,-88.034 ccw(c-118.867,-87.565) -118.203,-87.565 ; CON6.1@-118.397,-88.034 ccw(c-118.867,-87.565) -118.203,-87.565 ; CON6.1@-118.397,-88.034 ccw(c-118.867,-87.565) -118.203,-87.565 ; CON6.1@-118.397,-88.034 ccw(c-118.867,-87.565) -118.203,-87.565 ; CON6.1@-118.397,-88.034 ccw(c-118.867,-87.565) -118.203,-87.565 ; -118.203,-90.255 cw(c-117.177,-90.255) CON6.1@-117.902,-89.529 ; -118.203,-90.255 cw(c-117.177,-90.255) CON6.1@-117.902,-89.529 ; -118.203,-90.255 cw(c-117.177,-90.255) CON6.1@-117.902,-89.529 ; -118.203,-90.255 cw(c-117.177,-90.255) CON6.1@-117.902,-89.529 ; -118.203,-90.255 cw(c-117.177,-90.255) CON6.1@-117.902,-89.529 ; -118.203,-89.893 cw(c-117.539,-89.893) CON6.1@-118.009,-89.423 ; -118.203,-89.893 cw(c-117.539,-89.893) CON6.1@-118.009,-89.423 ; -118.203,-89.893 cw(c-117.539,-89.893) CON6.1@-118.009,-89.423 ; -118.203,-89.893 cw(c-117.539,-89.893) CON6.1@-118.009,-89.423 ; -118.203,-89.893 cw(c-117.539,-89.893) CON6.1@-118.009,-89.423 ; -118.203,-87.565 ccw(c-117.539,-87.565) CON6.1@-118.009,-88.034 ; -118.203,-87.565 ccw(c-117.539,-87.565) CON6.1@-118.009,-88.034 ; -118.203,-87.565 ccw(c-117.539,-87.565) CON6.1@-118.009,-88.034 ; -118.203,-87.565 ccw(c-117.539,-87.565) CON6.1@-118.009,-88.034 ; -118.203,-87.565 ccw(c-117.539,-87.565) CON6.1@-118.009,-88.034 ; -118.203,-87.203 ccw(c-117.177,-87.203) CON6.1@-117.902,-87.928 ; -118.203,-87.203 ccw(c-117.177,-87.203) CON6.1@-117.902,-87.928 ; -118.203,-87.203 ccw(c-117.177,-87.203) CON6.1@-117.902,-87.928 ; -118.203,-87.203 ccw(c-117.177,-87.203) CON6.1@-117.902,-87.928 ; -118.203,-87.203 ccw(c-117.177,-87.203) CON6.1@-117.902,-87.928 ; J2.78@-145.529,-93.776 ccw(c-145.152,-93.398) -145.152,-93.932 cw(c-145.152,-93.398) J2.78@-145.529,-93.776 ; J2.78@-145.423,-94.129 cw(c-144.947,-94.605) -144.947,-93.932 ccw(c-144.947,-94.605) J2.78@-145.423,-94.129 ; J2.78@-145.423,-93.669 ccw(c-144.79,-93.036) -144.79,-93.932 cw(c-144.79,-93.036) J2.78@-145.423,-93.669
SPICLK: J1.34 RA4.3 | length 22.5
  Top Layer w0.15: RA4.3@-111.42,-71.926 -109.726,-71.926 -109,-71.2 -109,-67.6 -108,-66.6 -106.198,-66.6 J1.34@-105.571,-65.972 ; RA4.3@-111.038,-72.05 cw(c-110.739,-72.348) -110.739,-71.926 ; RA4.3@-111.038,-72.05 cw(c-110.739,-72.348) -110.739,-71.926 ; RA4.3@-111.038,-72.05 cw(c-110.739,-72.348) -110.739,-71.926 ; RA4.3@-111.038,-72.05 cw(c-110.739,-72.348) -110.739,-71.926 ; RA4.3@-111.038,-72.05 cw(c-110.739,-72.348) -110.739,-71.926 ; RA4.3@-111.038,-71.802 ccw(c-110.739,-71.503) -110.739,-71.926 ; RA4.3@-111.038,-71.802 ccw(c-110.739,-71.503) -110.739,-71.926 ; RA4.3@-111.038,-71.802 ccw(c-110.739,-71.503) -110.739,-71.926 ; RA4.3@-111.038,-71.802 ccw(c-110.739,-71.503) -110.739,-71.926 ; RA4.3@-111.038,-71.802 ccw(c-110.739,-71.503) -110.739,-71.926 ; -106.126,-66.527 cw(c-105.571,-67.082) J1.34@-105.571,-66.297 ; -106.126,-66.527 ccw(c-106.68,-65.972) J1.34@-105.896,-65.972 ; -106.126,-66.527 cw(c-105.571,-67.082) J1.34@-105.571,-66.297 ; -106.126,-66.527 ccw(c-106.68,-65.972) J1.34@-105.896,-65.972 ; -106.126,-66.527 cw(c-105.571,-67.082) J1.34@-105.571,-66.297 ; -106.126,-66.527 ccw(c-106.68,-65.972) J1.34@-105.896,-65.972 ; J1.34@-105.87,-66.271 cw(c-105.571,-66.57) J1.34@-105.571,-66.147 ; J1.34@-105.87,-66.271 ccw(c-106.168,-65.972) J1.34@-105.746,-65.972 ; J1.34@-105.87,-66.271 cw(c-105.571,-66.57) J1.34@-105.571,-66.147 ; J1.34@-105.87,-66.271 ccw(c-106.168,-65.972) J1.34@-105.746,-65.972 ; J1.34@-105.87,-66.271 cw(c-105.571,-66.57) J1.34@-105.571,-66.147 ; J1.34@-105.87,-66.271 ccw(c-106.168,-65.972) J1.34@-105.746,-65.972 ; -106.167,-66.568 ccw(c-106.706,-66.029) -105.945,-65.98 cw(c-106.706,-66.029) -106.167,-66.568 ; -106.068,-66.47 cw(c-105.621,-66.917) -105.621,-66.284 ccw(c-105.621,-66.917) -106.068,-66.47 ; -105.932,-66.334 ccw(c-106.265,-66.001) -105.795,-65.971 cw(c-106.265,-66.001) -105.932,-66.334
SPIMISO: J1.33 RA4.4 | length 20.7
  Top Layer w0.15: RA4.4@-111.42,-71.037 -110.137,-71.037 -109.7,-70.6 -109.7,-67.5 -108.172,-65.972 J1.33@-106.841,-65.972 ; RA4.4@-111.038,-71.161 cw(c-110.739,-71.459) -110.739,-71.037 ; RA4.4@-111.038,-71.161 cw(c-110.739,-71.459) -110.739,-71.037 ; RA4.4@-111.038,-71.161 cw(c-110.739,-71.459) -110.739,-71.037 ; RA4.4@-111.038,-71.161 cw(c-110.739,-71.459) -110.739,-71.037 ; RA4.4@-111.038,-71.161 cw(c-110.739,-71.459) -110.739,-71.037 ; RA4.4@-111.038,-70.913 ccw(c-110.739,-70.614) -110.739,-71.037 ; RA4.4@-111.038,-70.913 ccw(c-110.739,-70.614) -110.739,-71.037 ; RA4.4@-111.038,-70.913 ccw(c-110.739,-70.614) -110.739,-71.037 ; RA4.4@-111.038,-70.913 ccw(c-110.739,-70.614) -110.739,-71.037 ; RA4.4@-111.038,-70.913 ccw(c-110.739,-70.614) -110.739,-71.037 ; -107.625,-65.972 cw(c-107.625,-66.757) J1.33@-107.071,-66.202 ; -107.625,-65.972 ccw(c-107.625,-65.188) J1.33@-107.071,-65.743 ; -107.625,-65.972 cw(c-107.625,-66.757) J1.33@-107.071,-66.202 ; -107.625,-65.972 ccw(c-107.625,-65.188) J1.33@-107.071,-65.743 ; -107.625,-65.972 cw(c-107.625,-66.757) J1.33@-107.071,-66.202 ; -107.625,-65.972 ccw(c-107.625,-65.188) J1.33@-107.071,-65.743 ; J1.33@-107.263,-65.972 cw(c-107.263,-66.395) J1.33@-106.965,-66.096 ; J1.33@-107.263,-65.972 ccw(c-107.263,-65.55) J1.33@-106.965,-65.849 ; J1.33@-107.263,-65.972 cw(c-107.263,-66.395) J1.33@-106.965,-66.096 ; J1.33@-107.263,-65.972 ccw(c-107.263,-65.55) J1.33@-106.965,-65.849 ; J1.33@-107.263,-65.972 cw(c-107.263,-66.395) J1.33@-106.965,-66.096 ; J1.33@-107.263,-65.972 ccw(c-107.263,-65.55) J1.33@-106.965,-65.849 ; -107.707,-65.972 ccw(c-107.707,-65.143) -107.121,-65.73 cw(c-107.707,-65.143) -107.707,-65.972 ; -107.644,-65.972 cw(c-107.644,-66.712) -107.121,-66.189 ccw(c-107.644,-66.712) -107.644,-65.972 ; -107.345,-65.972 ccw(c-107.345,-65.505) -107.015,-65.836 cw(c-107.345,-65.505) -107.345,-65.972
SPIMOSI: J1.82 RA3.4 | length 25.6
  Top Layer w0.15: J1.82@-105.571,-96.474 -104.726,-96.474 ; RA3.4@-98.48,-105.063 -101.137,-105.063 -101.7,-104.5 -101.7,-101.2 -103.4,-99.5 -103.4,-97.8 -104.726,-96.474 ; J1.82@-105.447,-96.597 cw(c-105.148,-96.896) J1.82@-105.148,-96.474 ; J1.82@-105.447,-96.597 cw(c-105.148,-96.896) J1.82@-105.148,-96.474 ; J1.82@-105.447,-96.597 cw(c-105.148,-96.896) J1.82@-105.148,-96.474 ; J1.82@-105.447,-96.35 ccw(c-105.148,-96.051) J1.82@-105.148,-96.474 ; J1.82@-105.447,-96.35 ccw(c-105.148,-96.051) J1.82@-105.148,-96.474 ; J1.82@-105.447,-96.35 ccw(c-105.148,-96.051) J1.82@-105.148,-96.474 ; J1.82@-105.341,-96.703 cw(c-104.786,-97.258) -104.786,-96.474 ; J1.82@-105.341,-96.703 cw(c-104.786,-97.258) -104.786,-96.474 ; J1.82@-105.341,-96.703 cw(c-104.786,-97.258) -104.786,-96.474 ; J1.82@-105.341,-96.244 ccw(c-104.786,-95.689) -104.786,-96.474 ; J1.82@-105.341,-96.244 ccw(c-104.786,-95.689) -104.786,-96.474 ; J1.82@-105.341,-96.244 ccw(c-104.786,-95.689) -104.786,-96.474 ; -104.726,-96.474 cw(c-104.726,-95.741) -105.277,-96.225 ccw(c-104.726,-95.741) -104.726,-96.474 ; -99.161,-105.063 cw(c-99.161,-105.486) RA3.4@-98.862,-105.187 ; -99.161,-105.063 ccw(c-99.161,-104.641) RA3.4@-98.862,-104.939 ; -99.161,-105.063 cw(c-99.161,-105.486) RA3.4@-98.862,-105.187 ; -99.161,-105.063 ccw(c-99.161,-104.641) RA3.4@-98.862,-104.939 ; -99.161,-105.063 cw(c-99.161,-105.486) RA3.4@-98.862,-105.187 ; -99.161,-105.063 ccw(c-99.161,-104.641) RA3.4@-98.862,-104.939 ; -99.161,-105.063 cw(c-99.161,-105.486) RA3.4@-98.862,-105.187 ; -99.161,-105.063 ccw(c-99.161,-104.641) RA3.4@-98.862,-104.939 ; -99.161,-105.063 ccw(c-99.161,-104.641) RA3.4@-98.862,-104.939 ; -99.161,-105.063 cw(c-99.161,-105.486) RA3.4@-98.862,-105.187 ; J1.82@-105.389,-96.324 ccw(c-105.058,-96.032) -105.058,-96.474 cw(c-105.058,-96.032) J1.82@-105.389,-96.324 ; J1.82@-105.291,-96.669 cw(c-104.819,-97.141) -104.819,-96.474 ccw(c-104.819,-97.141) J1.82@-105.291,-96.669
SUB_DM1: R36.1 U3.27 USBH1.2 | length 159.3
  Top Layer w0.15: v1@-40.088,-68.388 cw(c-40.302,-68.602) -40,-68.602 cw(c-39.698,-68.602) v1@-39.912,-68.388 ; v1(-40,-68.3) -40,-71.2 -39.45,-71.75 U3.27@-38.1,-71.75 ; v1(-40,-65.4) -34.9,-65.4 -29.3,-59.8 -11.6,-59.8 -10.8,-60.6 -7.9,-60.6 -6.7,-59.4 -6.7,-34.4 -8.309,-32.791 USBH1.2@-12.213,-32.791 -12.235,-32.813 R36.1@-16.24,-32.813 ; v1@-39.912,-65.488 cw(c-39.698,-65.702) -39.698,-65.4 cw(c-39.698,-65.098) v1@-39.912,-65.312 ; U3.27@-38.704,-71.814 ccw(c-38.857,-71.967) -38.857,-71.75 ccw(c-38.857,-71.533) U3.27@-38.704,-71.686 ; U3.27@-38.699,-71.814 ccw(c-38.852,-71.967) -38.852,-71.75 ccw(c-38.852,-71.533) U3.27@-38.699,-71.686 ; v1@-40.124,-68.424 cw(c-40.422,-68.722) -40,-68.722 ; v1@-40.124,-68.424 cw(c-40.422,-68.722) -40,-68.722 ; v1@-40.124,-68.424 cw(c-40.422,-68.722) -40,-68.722 ; v1@-40.124,-68.424 cw(c-40.422,-68.722) -40,-68.722 ; -40,-68.722 cw(c-39.578,-68.722) v1@-39.876,-68.424 ; -40,-68.722 cw(c-39.578,-68.722) v1@-39.876,-68.424 ; -40,-68.722 cw(c-39.578,-68.722) v1@-39.876,-68.424 ; -40,-68.722 cw(c-39.578,-68.722) v1@-39.876,-68.424 ; v1@-39.876,-65.524 cw(c-39.578,-65.822) -39.578,-65.4 ; v1@-39.876,-65.524 cw(c-39.578,-65.822) -39.578,-65.4 ; v1@-39.876,-65.524 cw(c-39.578,-65.822) -39.578,-65.4 ; v1@-39.876,-65.524 cw(c-39.578,-65.822) -39.578,-65.4 ; v1@-39.876,-65.276 ccw(c-39.578,-64.978) -39.578,-65.4 ; v1@-39.876,-65.276 ccw(c-39.578,-64.978) -39.578,-65.4 ; v1@-39.876,-65.276 ccw(c-39.578,-64.978) -39.578,-65.4 ; v1@-39.876,-65.276 ccw(c-39.578,-64.978) -39.578,-65.4 ; -38.802,-71.75 cw(c-38.802,-71.967) U3.27@-38.649,-71.814 ; -38.802,-71.75 ccw(c-38.802,-71.533) U3.27@-38.649,-71.686 ; -38.802,-71.75 cw(c-38.802,-71.967) U3.27@-38.649,-71.814 ; -38.802,-71.75 ccw(c-38.802,-71.533) U3.27@-38.649,-71.686 ; -38.802,-71.75 cw(c-38.802,-71.967) U3.27@-38.649,-71.814 ; -38.802,-71.75 ccw(c-38.802,-71.533) U3.27@-38.649,-71.686 ; R36.1@-15.897,-33.029 cw(c-15.375,-33.551) -15.375,-32.813 ; R36.1@-15.897,-33.029 cw(c-15.375,-33.551) -15.375,-32.813 ; R36.1@-15.897,-33.029 cw(c-15.375,-33.551) -15.375,-32.813 ; R36.1@-15.897,-33.029 cw(c-15.375,-33.551) -15.375,-32.813 ; R36.1@-15.897,-33.029 cw(c-15.375,-33.551) -15.375,-32.813 ; R36.1@-15.897,-32.596 ccw(c-15.375,-32.074) -15.375,-32.813 ; R36.1@-15.897,-32.596 ccw(c-15.375,-32.074) -15.375,-32.813 ; R36.1@-15.897,-32.596 ccw(c-15.375,-32.074) -15.375,-32.813 ; R36.1@-15.897,-32.596 ccw(c-15.375,-32.074) -15.375,-32.813 ; R36.1@-15.897,-32.596 ccw(c-15.375,-32.074) -15.375,-32.813 ; -13.895,-32.813 ccw(c-13.895,-31.11) USBH1.2@-12.691,-32.314 ; -13.895,-32.813 ccw(c-13.895,-31.11) USBH1.2@-12.691,-32.314 ; -13.895,-32.813 ccw(c-13.895,-31.11) USBH1.2@-12.691,-32.314 ; -13.895,-32.813 ccw(c-13.895,-31.11) USBH1.2@-12.691,-32.314 ; -13.895,-32.813 ccw(c-13.895,-31.11) USBH1.2@-12.691,-32.314 ; -13.791,-32.813 cw(c-13.791,-34.369) USBH1.2@-12.691,-33.269 ; -13.791,-32.813 cw(c-13.791,-34.369) USBH1.2@-12.691,-33.269 ; -13.791,-32.813 cw(c-13.791,-34.369) USBH1.2@-12.691,-33.269 ; -13.791,-32.813 cw(c-13.791,-34.369) USBH1.2@-12.691,-33.269 ; -13.791,-32.813 cw(c-13.791,-34.369) USBH1.2@-12.691,-33.269 ; -13.533,-32.813 ccw(c-13.533,-31.472) USBH1.2@-12.585,-32.42 ; -13.533,-32.813 ccw(c-13.533,-31.472) USBH1.2@-12.585,-32.42 ; -13.533,-32.813 ccw(c-13.533,-31.472) USBH1.2@-12.585,-32.42 ; -13.533,-32.813 ccw(c-13.533,-31.472) USBH1.2@-12.585,-32.42 ; -13.533,-32.813 ccw(c-13.533,-31.472) USBH1.2@-12.585,-32.42 ; -13.429,-32.813 cw(c-13.429,-34.007) USBH1.2@-12.585,-33.162 ; -13.429,-32.813 cw(c-13.429,-34.007) USBH1.2@-12.585,-33.162 ; -13.429,-32.813 cw(c-13.429,-34.007) USBH1.2@-12.585,-33.162 ; -13.429,-32.813 cw(c-13.429,-34.007) USBH1.2@-12.585,-33.162 ; -13.429,-32.813 cw(c-13.429,-34.007) USBH1.2@-12.585,-33.162 ; -13.17,-32.813 ccw(c-13.17,-31.834) USBH1.2@-12.479,-32.526 ; -13.17,-32.813 ccw(c-13.17,-31.834) USBH1.2@-12.479,-32.526 ; -13.17,-32.813 ccw(c-13.17,-31.834) USBH1.2@-12.479,-32.526 ; -13.17,-32.813 ccw(c-13.17,-31.834) USBH1.2@-12.479,-32.526 ; -13.17,-32.813 ccw(c-13.17,-31.834) USBH1.2@-12.479,-32.526 ; -13.067,-32.813 cw(c-13.067,-33.645) USBH1.2@-12.479,-33.056 ; -13.067,-32.813 cw(c-13.067,-33.645) USBH1.2@-12.479,-33.056 ; -13.067,-32.813 cw(c-13.067,-33.645) USBH1.2@-12.479,-33.056 ; -13.067,-32.813 cw(c-13.067,-33.645) USBH1.2@-12.479,-33.056 ; -13.067,-32.813 cw(c-13.067,-33.645) USBH1.2@-12.479,-33.056 ; USBH1.2@-11.948,-33.056 cw(c-11.308,-33.697) -11.308,-32.791 ; USBH1.2@-11.948,-33.056 cw(c-11.308,-33.697) -11.308,-32.791 ; USBH1.2@-11.948,-33.056 cw(c-11.308,-33.697) -11.308,-32.791 ; USBH1.2@-11.948,-33.056 cw(c-11.308,-33.697) -11.308,-32.791 ; USBH1.2@-11.948,-33.056 cw(c-11.308,-33.697) -11.308,-32.791 ; USBH1.2@-11.948,-32.526 ccw(c-11.308,-31.886) -11.308,-32.791 ; USBH1.2@-11.948,-32.526 ccw(c-11.308,-31.886) -11.308,-32.791 ; USBH1.2@-11.948,-32.526 ccw(c-11.308,-31.886) -11.308,-32.791 ; USBH1.2@-11.948,-32.526 ccw(c-11.308,-31.886) -11.308,-32.791 ; USBH1.2@-11.948,-32.526 ccw(c-11.308,-31.886) -11.308,-32.791 ; USBH1.2@-11.842,-33.162 cw(c-10.946,-34.059) -10.946,-32.791 ; USBH1.2@-11.842,-33.162 cw(c-10.946,-34.059) -10.946,-32.791 ; USBH1.2@-11.842,-33.162 cw(c-10.946,-34.059) -10.946,-32.791 ; USBH1.2@-11.842,-33.162 cw(c-10.946,-34.059) -10.946,-32.791 ; USBH1.2@-11.842,-33.162 cw(c-10.946,-34.059) -10.946,-32.791 ; USBH1.2@-11.842,-32.42 ccw(c-10.946,-31.524) -10.946,-32.791 ; USBH1.2@-11.842,-32.42 ccw(c-10.946,-31.524) -10.946,-32.791 ; USBH1.2@-11.842,-32.42 ccw(c-10.946,-31.524) -10.946,-32.791 ; USBH1.2@-11.842,-32.42 ccw(c-10.946,-31.524) -10.946,-32.791 ; USBH1.2@-11.842,-32.42 ccw(c-10.946,-31.524) -10.946,-32.791 ; USBH1.2@-11.736,-33.269 cw(c-10.584,-34.421) -10.584,-32.791 ; USBH1.2@-11.736,-33.269 cw(c-10.584,-34.421) -10.584,-32.791 ; USBH1.2@-11.736,-33.269 cw(c-10.584,-34.421) -10.584,-32.791 ; USBH1.2@-11.736,-33.269 cw(c-10.584,-34.421) -10.584,-32.791 ; USBH1.2@-11.736,-33.269 cw(c-10.584,-34.421) -10.584,-32.791 ; USBH1.2@-11.736,-32.314 ccw(c-10.584,-31.162) -10.584,-32.791 ; USBH1.2@-11.736,-32.314 ccw(c-10.584,-31.162) -10.584,-32.791 ; USBH1.2@-11.736,-32.314 ccw(c-10.584,-31.162) -10.584,-32.791 ; USBH1.2@-11.736,-32.314 ccw(c-10.584,-31.162) -10.584,-32.791 ; USBH1.2@-11.736,-32.314 ccw(c-10.584,-31.162) -10.584,-32.791
  Bottom Layer w0.15: v1@-40.088,-68.212 ccw(c-40.302,-67.998) -40,-67.998 ccw(c-39.698,-67.998) v1@-39.912,-68.212 ; v1@-40.088,-65.488 cw(c-40.302,-65.702) -40,-65.702 cw(c-39.698,-65.702) v1@-39.912,-65.488 ; v1(-40,-68.3) v1(-40,-65.4) ; v1@-40.124,-68.176 ccw(c-40.422,-67.878) -40,-67.878 ; v1@-40.124,-68.176 ccw(c-40.422,-67.878) -40,-67.878 ; v1@-40.124,-68.176 ccw(c-40.422,-67.878) -40,-67.878 ; v1@-40.124,-68.176 ccw(c-40.422,-67.878) -40,-67.878 ; v1@-40.124,-65.524 cw(c-40.422,-65.822) -40,-65.822 ; v1@-40.124,-65.524 cw(c-40.422,-65.822) -40,-65.822 ; v1@-40.124,-65.524 cw(c-40.422,-65.822) -40,-65.822 ; v1@-40.124,-65.524 cw(c-40.422,-65.822) -40,-65.822 ; -40,-67.878 ccw(c-39.578,-67.878) v1@-39.876,-68.176 ; -40,-67.878 ccw(c-39.578,-67.878) v1@-39.876,-68.176 ; -40,-67.878 ccw(c-39.578,-67.878) v1@-39.876,-68.176 ; -40,-67.878 ccw(c-39.578,-67.878) v1@-39.876,-68.176 ; -40,-65.822 cw(c-39.578,-65.822) v1@-39.876,-65.524 ; -40,-65.822 cw(c-39.578,-65.822) v1@-39.876,-65.524 ; -40,-65.822 cw(c-39.578,-65.822) v1@-39.876,-65.524 ; -40,-65.822 cw(c-39.578,-65.822) v1@-39.876,-65.524
SUB_DM2: R38.1 U3.1 USBH2.2 | length 91.5
  Top Layer w0.15: U3.1@-45.35,-71.1 -42.6,-71.1 -41.9,-70.4 -41.9,-65.5 -40.7,-64.3 -35.7,-64.3 -32.2,-60.8 -32.2,-50.9 -30.613,-49.313 R38.1@-16.24,-49.313 -12.292,-49.313 USBH2.2@-12.213,-49.391 ; U3.1@-44.751,-71.164 cw(c-44.598,-71.317) -44.598,-71.1 cw(c-44.598,-70.883) U3.1@-44.751,-71.036 ; U3.1@-44.746,-71.164 cw(c-44.593,-71.317) -44.593,-71.1 cw(c-44.593,-70.883) U3.1@-44.746,-71.036 ; U3.1@-44.801,-71.164 cw(c-44.648,-71.317) -44.648,-71.1 ; U3.1@-44.801,-71.164 cw(c-44.648,-71.317) -44.648,-71.1 ; U3.1@-44.801,-71.164 cw(c-44.648,-71.317) -44.648,-71.1 ; U3.1@-44.801,-71.036 ccw(c-44.648,-70.883) -44.648,-71.1 ; U3.1@-44.801,-71.036 ccw(c-44.648,-70.883) -44.648,-71.1 ; U3.1@-44.801,-71.036 ccw(c-44.648,-70.883) -44.648,-71.1 ; -17.106,-49.313 cw(c-17.106,-50.051) R38.1@-16.584,-49.529 ; -17.106,-49.313 ccw(c-17.106,-48.574) R38.1@-16.584,-49.096 ; -17.106,-49.313 cw(c-17.106,-50.051) R38.1@-16.584,-49.529 ; -17.106,-49.313 ccw(c-17.106,-48.574) R38.1@-16.584,-49.096 ; -17.106,-49.313 cw(c-17.106,-50.051) R38.1@-16.584,-49.529 ; -17.106,-49.313 ccw(c-17.106,-48.574) R38.1@-16.584,-49.096 ; -17.106,-49.313 cw(c-17.106,-50.051) R38.1@-16.584,-49.529 ; -17.106,-49.313 ccw(c-17.106,-48.574) R38.1@-16.584,-49.096 ; -17.106,-49.313 ccw(c-17.106,-48.574) R38.1@-16.584,-49.096 ; -17.106,-49.313 cw(c-17.106,-50.051) R38.1@-16.584,-49.529 ; R38.1@-15.897,-49.529 cw(c-15.375,-50.051) -15.375,-49.313 ; R38.1@-15.897,-49.529 cw(c-15.375,-50.051) -15.375,-49.313 ; R38.1@-15.897,-49.529 cw(c-15.375,-50.051) -15.375,-49.313 ; R38.1@-15.897,-49.529 cw(c-15.375,-50.051) -15.375,-49.313 ; R38.1@-15.897,-49.529 cw(c-15.375,-50.051) -15.375,-49.313 ; R38.1@-15.897,-49.096 ccw(c-15.375,-48.574) -15.375,-49.313 ; R38.1@-15.897,-49.096 ccw(c-15.375,-48.574) -15.375,-49.313 ; R38.1@-15.897,-49.096 ccw(c-15.375,-48.574) -15.375,-49.313 ; R38.1@-15.897,-49.096 ccw(c-15.375,-48.574) -15.375,-49.313 ; R38.1@-15.897,-49.096 ccw(c-15.375,-48.574) -15.375,-49.313 ; -14.033,-49.313 cw(c-14.033,-51.211) USBH2.2@-12.691,-49.869 ; -14.033,-49.313 cw(c-14.033,-51.211) USBH2.2@-12.691,-49.869 ; -14.033,-49.313 cw(c-14.033,-51.211) USBH2.2@-12.691,-49.869 ; -14.033,-49.313 cw(c-14.033,-51.211) USBH2.2@-12.691,-49.869 ; -14.033,-49.313 cw(c-14.033,-51.211) USBH2.2@-12.691,-49.869 ; -13.671,-49.313 cw(c-13.671,-50.848) USBH2.2@-12.585,-49.762 ; -13.671,-49.313 cw(c-13.671,-50.848) USBH2.2@-12.585,-49.762 ; -13.671,-49.313 cw(c-13.671,-50.848) USBH2.2@-12.585,-49.762 ; -13.671,-49.313 cw(c-13.671,-50.848) USBH2.2@-12.585,-49.762 ; -13.671,-49.313 cw(c-13.671,-50.848) USBH2.2@-12.585,-49.762 ; -13.653,-49.313 ccw(c-13.653,-47.951) USBH2.2@-12.691,-48.914 ; -13.653,-49.313 ccw(c-13.653,-47.951) USBH2.2@-12.691,-48.914 ; -13.653,-49.313 ccw(c-13.653,-47.951) USBH2.2@-12.691,-48.914 ; -13.653,-49.313 ccw(c-13.653,-47.951) USBH2.2@-12.691,-48.914 ; -13.653,-49.313 ccw(c-13.653,-47.951) USBH2.2@-12.691,-48.914 ; -13.308,-49.313 cw(c-13.308,-50.486) USBH2.2@-12.479,-49.656 ; -13.308,-49.313 cw(c-13.308,-50.486) USBH2.2@-12.479,-49.656 ; -13.308,-49.313 cw(c-13.308,-50.486) USBH2.2@-12.479,-49.656 ; -13.308,-49.313 cw(c-13.308,-50.486) USBH2.2@-12.479,-49.656 ; -13.308,-49.313 cw(c-13.308,-50.486) USBH2.2@-12.479,-49.656 ; -13.291,-49.313 ccw(c-13.291,-48.314) USBH2.2@-12.585,-49.02 ; -13.291,-49.313 ccw(c-13.291,-48.314) USBH2.2@-12.585,-49.02 ; -13.291,-49.313 ccw(c-13.291,-48.314) USBH2.2@-12.585,-49.02 ; -13.291,-49.313 ccw(c-13.291,-48.314) USBH2.2@-12.585,-49.02 ; -13.291,-49.313 ccw(c-13.291,-48.314) USBH2.2@-12.585,-49.02